# EAGLE board LESR_MainBoard (EAGLE 9.5.2)
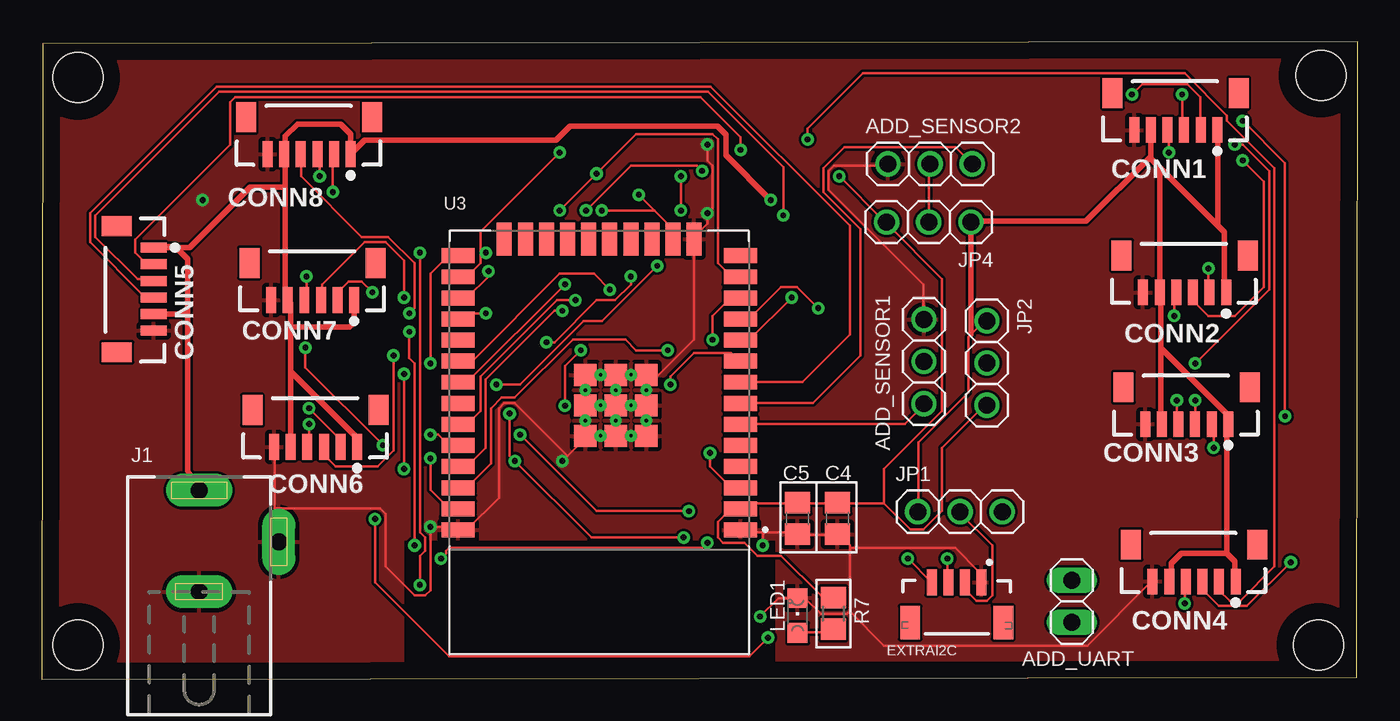
[diagram p0: board, top side]
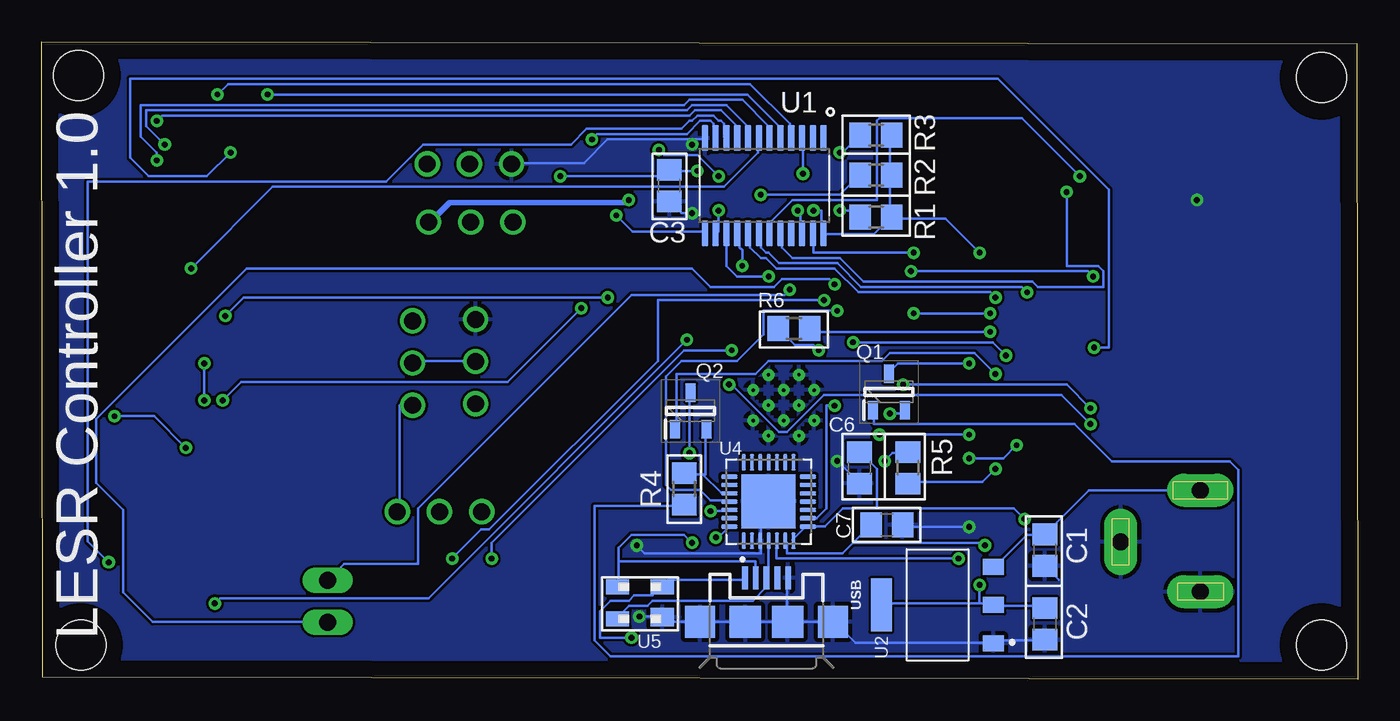
[diagram p1: board, bottom side, seen from below]

Size 79.24 x 38.41 mm. Coordinates in mm from the lower left corner, seen from the top.
Outline: 0,0 79.16,0.14 79.24,38.41 0.08,38.27 0,0
Copper layers (1*16): Top 0.035mm / dielectric 1.5mm / Bottom 0.035mm
Design rules "default": minimum track width 6mil, minimum drill 0.35mm, track to track 6mil, track to pad 6mil, pad to pad 6mil, via to via 6mil, smd to smd 6mil, copper to edge 40mil, drill to drill 6mil, minimum pad ring 10mil, minimum via ring 8mil, stop-mask expansion 4mil, vias tented up to drill 0mil, thermal gap 10mil
Holes 3 mm at 2.2,36.23 2.2,2.07 77,36.36 76.87,2.07

## Footprints (pad centres in the part's own frame; a part is rotated, then mirrored left to right if it is on the bottom)
1X03 = drill 1.016: 1 -2.54,0; 2 0,0; 3 2.54,0
1X02 = drill 1.016 long: 1 -1.27,0; 2 1.27,0
C0805 = smd 1.3 x 1.5: 1 -0.95,0; 2 0.95,0
JST-6-SMD-VERT-1.0MM = smd 0.6 x 1.55: 1 -2.54,1.27; 2 -1.54,1.27; 3 -0.54,1.27; 4 0.46,1.27; 5 1.46,1.27; 6 2.46,1.27 | smd 1.2 x 1.8: P$1 -3.84,-0.955; P$2 3.76,-0.955
JST04_1MM_VERT = smd 0.6 x 1.55: 1 -1.478,0.775; 2 -0.478,0.775; 3 0.522,0.775; 4 1.522,0.775 | smd 1.2 x 2: NC1 -2.778,3.2; NC2 2.822,3.2
DCJ0202 = drill 1 pad 2 long: 1 0,3.1; 2 4.8,0; 3 0,-3
CHIPLED_0805 = smd 1.2 x 1.2: A 0,-1.05; C 0,1.05
SOT95P240X115-3N = smd 1.1 x 0.6: 1 -1.1,0.95; 2 -1.1,-0.95; 3 1.1,0
R0805 = smd 1.3 x 1.5: 1 -0.95,0; 2 0.95,0
SOP65P640X120-24N = smd 1.57 x 0.41: 1 -2.87,3.575; 2 -2.87,2.925; 3 -2.87,2.275; 4 -2.87,1.625; 5 -2.87,0.975; 6 -2.87,0.325; 7 -2.87,-0.325; 8 -2.87,-0.975; 9 -2.87,-1.625; 10 -2.87,-2.275; 11 -2.87,-2.925; 12 -2.87,-3.575; 13 2.87,-3.575; 14 2.87,-2.925; 15 2.87,-2.275; 16 2.87,-1.625; 17 2.87,-0.975; 18 2.87,-0.325; 19 2.87,0.325; 20 2.87,0.975; 21 2.87,1.625; 22 2.87,2.275; 23 2.87,2.925; 24 2.87,3.575
SOT-223 = smd 0.96 x 1.26: 1 -2.3,-3.375; 2 0,-3.375; 3 2.3,-3.375 | smd 3.19 x 1.26: 4 0,3.375
MODULE_ESP32-WROOM-32 = smd 2 x 0.9: 1 -8.5,5.26; 2 -8.5,3.99; 3 -8.5,2.72; 4 -8.5,1.45; 5 -8.5,0.18; 6 -8.5,-1.09; 7 -8.5,-2.36; 8 -8.5,-3.63; 9 -8.5,-4.9; 10 -8.5,-6.17; 11 -8.5,-7.44; 12 -8.5,-8.71; 13 -8.5,-9.98; 14 -8.5,-11.25; 25 8.5,-11.25; 26 8.5,-9.98; 27 8.5,-8.71; 28 8.5,-7.44; 29 8.5,-6.17; 30 8.5,-4.9; 31 8.5,-3.63; 32 8.5,-2.36; 33 8.5,-1.09; 34 8.5,0.18; 35 8.5,1.45; 36 8.5,2.72; 37 8.5,3.99; 38 8.5,5.26 | smd 0.9 x 2: 15 -5.715,-12.25; 16 -4.445,-12.25; 17 -3.175,-12.25; 18 -1.905,-12.25; 19 -0.635,-12.25; 20 0.635,-12.25; 21 1.905,-12.25; 22 3.175,-12.25; 23 4.445,-12.25; 24 5.715,-12.25 | smd 1.33 x 1.33: 39_1 -2.835,-0.405; 39_2 -1,-0.405; 39_3 0.835,-0.405; 39_4 -2.835,-2.24; 39_5 -1,-2.24; 39_6 0.835,-2.24; 39_7 -2.835,-4.075; 39_8 -1,-4.075; 39_9 0.835,-4.075 | drill 0.2 pad 0.3: 39_10 -1.917,-0.405; 39_11 -0.083,-0.405; 39_12 -2.835,-1.323; 39_13 -1,-1.323; 39_14 0.835,-1.323; 39_15 -1.917,-2.24; 39_16 -0.083,-2.24; 39_17 -2.835,-3.158; 39_18 -1,-3.158; 39_19 0.835,-3.158; 39_20 -1.917,-4.075; 39_21 -0.083,-4.075
QFN50P500X500X80-29N = smd 1.01 x 0.27: 1 -2.36,1.5; 2 -2.36,1; 3 -2.36,0.5; 4 -2.36,0; 5 -2.36,-0.5; 6 -2.36,-1; 7 -2.36,-1.5; 15 2.36,-1.5; 16 2.36,-1; 17 2.36,-0.5; 18 2.36,0; 19 2.36,0.5; 20 2.36,1; 21 2.36,1.5 | smd 0.27 x 1.01: 8 -1.5,-2.36; 9 -1,-2.36; 10 -0.5,-2.36; 11 0,-2.36; 12 0.5,-2.36; 13 1,-2.36; 14 1.5,-2.36; 22 1.5,2.36; 23 1,2.36; 24 0.5,2.36; 25 0,2.36; 26 -0.5,2.36; 27 -1,2.36; 28 -1.5,2.36 | smd 3.25 x 3.25: 29 0,0
SOT143 = smd 1.4 x 1.1: 1 -1.35,0.86 | smd 1.4 x 0.9: 2 -1.35,-0.96; 3 1.35,-0.96; 4 1.35,0.96
USB-MICROB = smd 1.4 x 0.35: D+ -2.65,0; D- -2.65,-0.65; GND -2.65,1.3; ID -2.65,0.65; VBUS -2.65,-1.3 | smd 1.9 x 1.8: MT1 0,-4; MT2 0,4 | smd 1.9 x 1.9: P$1 0,-1.27; P$2 0,1.27

## Placement (x,y rotation side)
ADD_SENSOR1  [1X03]  53.11,19.14 270 top
ADD_SENSOR2  [1X03]  53.48,31.04 0 top
ADD_UART  [1X02]  62.01,4.7 270 top
C1  4.7uF  [C0805]  18.83,7.79 270 bottom
C2  4.7uF  [C0805]  18.83,3.34 270 bottom
C3  10uF  [C0805]  41.45,29.73 270 bottom
C4  10uF  [C0805]  47.92,9.69 270 top
C5  0.1uF  [C0805]  45.5,9.69 270 top
C6  1uF  [C0805]  30.01,12.74 270 bottom
C7  0.1uF  [C0805]  28.36,9.31 0 bottom
CONN1  JST_6_PIN_VERTICAL  [JST-6-SMD-VERT-1.0MM]  68.22,34.35 180 top
CONN2  JST_6_PIN_VERTICAL  [JST-6-SMD-VERT-1.0MM]  68.76,24.57 180 top
CONN3  JST_6_PIN_VERTICAL  [JST-6-SMD-VERT-1.0MM]  68.88,16.64 180 top
CONN4  JST_6_PIN_VERTICAL  [JST-6-SMD-VERT-1.0MM]  69.33,7.16 180 top
CONN5  JST_6_PIN_VERTICAL  [JST-6-SMD-VERT-1.0MM]  5.49,23.46 270 top
CONN6  JST_6_PIN_VERTICAL  [JST-6-SMD-VERT-1.0MM]  16.46,15.27 180 top
CONN7  JST_6_PIN_VERTICAL  [JST-6-SMD-VERT-1.0MM]  16.28,24.12 180 top
CONN8  JST_6_PIN_VERTICAL  [JST-6-SMD-VERT-1.0MM]  16.07,32.89 180 top
EXTRAI2C  Vertical Qwiic Connector  [JST04_1MM_VERT]  55.11,6.62 180 top
J1  DCJ0202  [DCJ0202]  9.49,8.28 0 top
JP1  [1X03]  55.28,10.1 0 top
JP2  [1X03]  56.9,19.05 270 top
JP4  [1X03]  53.4,27.53 180 top
LED1  [CHIPLED_0805]  45.5,3.85 0 top
Q1  SS8050-G  [SOT95P240X115-3N]  28.23,17.31 90 bottom
Q2  SS8050-G  [SOT95P240X115-3N]  40.17,16.17 90 bottom
R1  10k  [R0805]  29.01,27.83 0 bottom
R2  10k  [R0805]  29.01,30.37 0 bottom
R3  10k  [R0805]  29.01,32.78 0 bottom
R4  10k  [R0805]  40.55,11.47 270 bottom
R5  10k  [R0805]  27.09,12.74 90 bottom
R6  10k  [R0805]  33.95,21.12 180 bottom
R7  470  [R0805]  47.66,3.98 90 top
U1  TCA9548APWR  [SOP65P640X120-24N]  35.74,29.73 270 bottom
U2  NCP1117ST33T3G  [SOT-223]  25.31,4.48 90 bottom
U3  ESP32-WROOM-32  [MODULE_ESP32-WROOM-32]  33.57,14.26 180 top
U4  CP2102N-A01-GQFN28  [QFN50P500X500X80-29N]  35.47,10.71 90 bottom
U5  SP0503BAHT  [SOT143]  43.22,4.61 180 bottom
USB  [USB-MICROB]  35.6,3.47 270 bottom

## Library data of the parts
ADD_SENSOR1 ADD_SENSOR2 JP1 JP2 JP4 = adafruit
ADD_UART = pinhead
C1-C7 = rcl; SPICEPREFIX: C
CONN1-CONN8 = SparkFun-Connectors; PROD_ID: CONN-08249; SF_ID: GPS-00579
EXTRAI2C = SparkFun-Connectors; PROD_ID: CONN-14483
J1 = con-jack; OC_FARNELL: unknown; OC_NEWARK: unknown
LED1 = led
Q1 Q2 = SS8050-G_NPN_transistor; AVAILABILITY: Unavailable; DESCRIPTION: Bipolar _BJT_ Transistor NPN 25V 1.5A 100MHz 300mW Surface Mount SOT-23; MF: Comchip Technology; MP: SS8050-G; PACKAGE: TO-236 Comchip; PRICE: None
R1-R7 = rcl; SPICEPREFIX: R
U1 = TCA9548APWR_I2CMultiplexer; AVAILABILITY: Unavailable; DESCRIPTION: IC I2C SW 8CH W/RESET 24TSSOP; DIGIKEY-PURCHASE-URL: https://snapeda.com/shop?store=DigiKey&id=280817; MF: Texas Instruments; MP: TCA9548APWR; PACKAGE: TSSOP-24 Texas Instruments; PRICE: None
U2 = IC; CREATED_BY: PCBLayout.com; DIGIKEY_PART_NUMBER: NCP1117ST33T3GOSTR-ND; MANUFACTURER: ON Semiconductor; MPN: NCP1117ST33T3G; PACKAGE: SOT-223
U3 = ESP32-WROOM-32; AVAILABILITY: Unavailable; DESCRIPTION: Bluetooth, WiFi 802.11b/g/n, Bluetooth v4.2 + EDR, Class 1, 2 and 3 Transceiver Module 2.4GHz ~ 2.5GHz Integrated, Trace Surface Mount; MF: Espressif Systems; MP: ESP32-WROOM-32; PACKAGE: Module Espressif Systems; PRICE: None
U4 = CP2102N-A01-GQFN28; AVAILABILITY: Unavailable; DESCRIPTION: USB Bridge, USB to UART USB 2.0 UART Interface 28-QFN (5x5); MF: Silicon Labs; MP: CP2102N-A01-GQFN28; PACKAGE: QFN-28 Silicon Labs; PRICE: None
U5 = ESD_SP0503BAHT; AVAILABILITY: Unavailable; DESCRIPTION: 8.5V Clamp Ipp Tvs Diode Surface Mount SOT-143-4; MF: Littelfuse Inc.; MP: SP0503BAHT; PACKAGE: SOT-143 Littelfuse; PRICE: None
USB = SparkFun-Connectors; PROD_ID: CONN-09505; SF_ID: PRT-08533

## Nets
3.3V: C2.1 C3.1 C4.1 C5.1 JP1.3 JP2.3 JP4.3 R1.2 R2.2 R3.2 R7.2 U1.24 U2.2 U2.4 U3.2
DN: U4.5 U5.3 USB.D-
DP: U4.4 U5.4 USB.D+
DTR: Q1.2 R5.2 U4.28
E_RX: ADD_UART.2 U3.31
E_TX: ADD_UART.1 U3.30
EN: Q2.3 U3.3
GND: ADD_SENSOR1.1 ADD_SENSOR2.1 C1.2 C2.2 C3.2 C4.2 C5.2 C6.2 C7.2 CONN1.6 CONN2.6 CONN3.6 CONN4.6 CONN5.6 CONN6.6 CONN7.6 CONN8.6 EXTRAI2C.1 J1.2 J1.3 LED1.C U1.12 U2.1 U3.1 U3.15 U3.38 U3.39_1 U3.39_2 U3.39_3 U3.39_4 U3.39_5 U3.39_6 U3.39_7 U3.39_8 U3.39_9 U3.39_10 U3.39_11 U3.39_12 U3.39_13 U3.39_14 U3.39_15 U3.39_16 U3.39_17 U3.39_18 U3.39_19 U3.39_20 U3.39_21 U4.3 U4.29 U5.1 USB.GND USB.MT1 USB.MT2 USB.P$1 USB.P$2
IO0: Q1.3 U3.25
IO16: CONN7.4 U3.27
IO17: CONN8.4 U3.28
IO21: EXTRAI2C.3 U3.33
IO22: EXTRAI2C.4 U3.36
IO23: CONN1.4 U3.37
IO25: CONN2.4 U3.10
IO26: CONN3.4 U3.11
IO27: CONN4.4 U3.12
IO32: CONN5.4 U3.8
IO33: CONN6.4 U3.9
IO34: ADD_SENSOR1.3 U3.6
IO35: ADD_SENSOR2.3 U3.7
M_RST: R1.1 U1.3 U3.13
M_SCL: R2.1 U1.22 U3.16
M_SDA: R3.1 U1.23 U3.26
N$1: ADD_SENSOR1.2 JP2.2
N$3: Q1.1 R4.2
N$4: Q2.1 R5.1
N$5: ADD_SENSOR2.2 JP4.2
N$6: R6.2 U4.9
N$7: EXTRAI2C.2 JP1.2
N$8: LED1.A R7.1
RTS: Q2.2 R4.1 U4.24
RXD: U3.34 U4.26
SC0: CONN1.2 U1.5
SC1: CONN2.2 U1.7
SC2: CONN3.2 U1.9
SC3: CONN4.2 U1.11
SC4: CONN5.2 U1.14
SC5: CONN6.2 U1.16
SC6: CONN7.2 U1.18
SC7: CONN8.2 U1.20
SD0: CONN1.3 U1.4
SD1: CONN2.3 U1.6
SD2: CONN3.3 U1.8
SD3: CONN4.3 U1.10
SD4: CONN5.3 U1.13
SD5: CONN6.3 U1.15
SD6: CONN7.3 U1.17
SD7: CONN8.3 U1.19
TXD: U3.35 U4.25
VBUS: C6.1 U4.7 U4.8 U5.2 USB.VBUS
VDD: C7.1 R6.1 U4.6
VIN: C1.1 CONN1.1 CONN1.5 CONN2.1 CONN2.5 CONN3.1 CONN3.5 CONN4.1 CONN4.5 CONN5.1 CONN5.5 CONN6.1 CONN6.5 CONN7.1 CONN7.5 CONN8.1 CONN8.5 J1.1 JP1.1 JP2.1 JP4.1 U2.3

## Tracks (layer width: path | path; a pad name or v marks a point on that pad's centre or on a via)
3.3V  (via drill 0.35)
  Top 0.152: R7.2 47.54,5.06 46.9,5.06 44.52,7.44 43.09,7.44 42.3,8.23 41.03,8.23 40.71,8.55 40.71,9.5 41.35,10.13 41.98,10.13 U3.2 42.14,10.29 42.46,10.61 45.47,10.61 C5.1 45.63,10.61 47.85,10.61 C4.1 48.01,10.61 50.71,10.61 | 50.71,10.61 52.3,9.02 53.09,9.02 54.2,10.13 54.2,13.94 56.74,16.48 JP2.3 | v48.01,30.3 50.71,27.6 JP4.3 50.87,27.44 54.2,24.1 54.2,16.17 50.71,12.68 50.71,10.61 | v32.77,28.23 35.47,30.93 39.44,30.93 v39.76,30.61 | v22.77,5.69 22.77,7.44 23.09,7.75 23.09,8.55 22.77,8.86 v22.77,25.69
  Bottom 0.152: JP1.3 57.7,10.13 57.7,16.48 56.9,16.48 JP2.3 | C2.1 18.96,4.42 21.82,4.42 U2.2 21.98,4.58 22.77,4.58 | 22.77,4.58 28.65,4.58 U2.4 | R1.2 28.17,27.91 28.17,30.3 R2.2 28.17,30.46 28.17,32.68 R3.2 | R1.2 28.17,27.76 29.12,26.8 32.14,26.8 U1.24 32.3,26.96 32.3,28.23 v32.77,28.23 | v48.01,30.3 41.82,30.3 41.5,30.61 C3.1 41.35,30.61 v39.76,30.61 | v22.77,5.69 22.77,4.58 | v22.77,25.69 24.84,27.76 28.01,27.76 R1.2
DN  (via drill 0.35)
  Top 0.152: v24.04,7.28 24.36,7.6 24.36,7.75 24.52,7.91 39.76,7.91 v40.08,8.23
  Bottom 0.152: v24.04,7.28 35,7.28 35,8.23 U4.5 | v40.08,8.23 40.55,8.71 43.73,8.71 44.52,7.91 44.52,7.12 | 44.52,7.12 44.52,5.69 U5.3 | 44.52,7.12 36.27,7.12 36.27,6.17 USB.D-
DP
  Bottom 0.152: U4.4 35.47,6.17 USB.D+ 35.63,6.01 35.63,5.53 36.42,4.74 42.46,4.74 42.77,4.42 43.89,4.42 44.52,3.79 U5.4
DTR  (via drill 0.35)
  Top 0.152: v38.65,8.55 33.09,8.55 v28.49,13.15 28.17,13.47 v28.17,16.01
  Bottom 0.152: v38.65,8.55 38.49,8.55 37.85,9.18 U4.28 | v28.49,13.15 28.01,13.63 27.22,13.63 R5.2 | v28.17,16.01 27.53,16.01 27.38,16.17 Q1.2
E_RX  (via drill 0.35)
  Top 0.152: v31.5,23.79 25.63,17.91 25.15,17.91 U3.31
  Bottom 0.152: v31.5,23.79 31.82,24.1 34.68,24.1 35.15,23.63 38.96,23.63 40.08,24.74 66.9,24.74 75.95,15.69 75.95,11.82 74.33,10.2 74.33,5.25 72.56,3.47 62.14,3.47 ADD_UART.2
E_TX  (via drill 0.35)
  Top 0.152: v34.2,23.47 33.25,24.42 31.19,24.42 25.95,19.18 25.15,19.18 U3.30
  Bottom 0.152: v34.2,23.47 34.52,23.15 43.73,23.15 56.59,10.29 56.59,6.96 61.03,6.96 61.98,6.01 ADD_UART.1
EN  (via drill 0.35)
  Top 0.152: v40.23,13.63 40.23,12.83 41.5,11.56 41.98,11.56 U3.3
  Bottom 0.152: v40.23,13.63 40.23,17.12 Q2.3
GND  (via drill 0.35)
  Top 0.152: CONN3.6 66.43,15.21 | 66.43,23.15 CONN2.6 66.27,23.31 | 65.79,33 CONN1.6 | 66.75,6.01 CONN4.6 66.75,5.85 62.94,2.04 50.71,2.04 48.65,4.1 | 48.65,4.1 48.49,3.94 46.9,3.94 45.95,4.9 45.63,4.9 LED1.C 45.47,4.9 44.36,4.9 v43.25,3.79 | 48.65,7.91 48.65,8.07 48.01,8.71 C4.2 47.85,8.71 45.63,8.71 C5.2 45.47,8.86 43.41,8.86 | 48.65,7.91 48.65,4.1 | 48.65,7.91 55,7.91 56.43,6.48 56.43,5.85 EXTRAI2C.1 | 43.41,8.86 42.14,8.86 U3.1 | 43.41,8.86 v43.41,8.07 | ADD_SENSOR1.1 53.09,21.72 53.09,23.79 47.38,29.5 47.38,30.61 47.7,30.93 50.87,30.93 ADD_SENSOR2.1 | 32.77,14.74 32.77,15.53 U3.39_14 | 31.66,13.47 32.77,14.58 U3.39_3 32.77,14.74 | 31.66,13.47 v31.34,13.15 | 32.77,14.74 33.57,14.74 U3.39_11 33.73,14.74 34.52,14.74 U3.39_2 34.68,14.74 34.68,15.53 U3.39_13 34.68,15.69 34.68,16.48 U3.39_5 | 31.66,13.47 28.49,16.64 27.85,16.64 27.53,16.33 27.53,10.93 25.63,9.02 25.15,9.02 U3.38 24.99,9.02 24.84,9.18 v23.41,9.18 23.41,5.37 23.09,5.06 22.45,5.06 20.71,6.8 20.71,9.98 20.39,10.29 14.04,10.29 14.04,13.94 CONN6.6 13.88,14.1 | U3.39_5 34.68,16.64 34.68,17.28 U3.39_18 34.68,17.44 34.68,18.23 U3.39_8 34.68,18.39 35.47,18.39 U3.39_20 35.63,18.39 36.27,18.39 U3.39_7 36.42,18.23 36.42,17.6 | U3.39_5 34.52,16.48 33.73,16.48 U3.39_16 33.57,16.48 32.77,16.48 U3.39_6 32.77,16.64 32.77,17.28 U3.39_19 32.77,17.44 32.77,18.23 U3.39_9 32.77,18.39 33.57,18.39 U3.39_21 | U3.39_10 35.63,14.74 36.27,14.74 U3.39_1 36.42,14.74 36.42,15.53 U3.39_12 36.42,15.69 36.42,16.48 U3.39_4 | U3.39_4 36.27,16.48 35.63,16.48 U3.39_15 | U3.39_17 36.42,17.28 36.42,16.64 U3.39_4 | 36.42,17.6 36.42,17.44 U3.39_17
  Top 0.152: 36.42,17.6 39.28,20.45 U3.15 39.28,26.64 40.08,27.44 v40.08,28.07 40.39,28.39 40.39,30.93 40.08,31.25 v40.08,32.2 | 36.42,17.6 U3.39_17 | 6.9,21.09 CONN5.6 | 13.72,22.84 CONN7.6 | 13.88,22.84 CONN7.6 | 13.72,31.57 CONN8.6 | 13.72,22.99 CONN7.6
  Bottom 0.152: U4.29 35.47,10.61 35.95,10.61 35.95,8.39 U4.3 35.95,8.23 35.95,7.6 42.93,7.6 v43.41,8.07 | 40.08,32.52 45.16,32.52 46.58,31.09 50.87,31.09 ADD_SENSOR2.1 | 40.08,32.52 39.44,32.52 U1.12 | v23.41,9.18 27.38,9.18 C7.2 | v31.34,13.15 30.07,11.88 C6.2 | v40.08,28.07 40.71,28.07 41.35,28.71 C3.2 | v40.08,32.2 40.08,32.52 | 34.36,3.47 34.36,6.01 USB.GND | 34.36,3.47 USB.P$1 USB.MT1 41.66,3.47 41.82,3.63 U5.1 41.98,3.79 v43.25,3.79 | 34.36,3.47 USB.P$2 USB.MT2 31.5,3.47 30.23,2.2 21.98,2.2 U2.1 21.82,2.2 21.66,2.36 18.96,2.36 C2.2 18.8,2.52 | 18.01,6.01 18.8,6.8 C1.2
  other vias: 9.69,28.87
  pour Bottom: -1.36,40.3 80.94,40.3 81.32,39.92 81.32,-1.36 81.45,-1.49 -1.99,-1.49 -2.25,-1.23 -2.25,40.17 -2.12,40.3
  pour Top: -1.36,39.79 80.3,39.79 80.3,-0.09 79.92,-0.47 44.23,-0.47 44.23,8.42 21.76,8.42 21.76,0.17 21.63,0.04 21.5,-0.09 -0.6,-0.09 -0.6,38.9 -1.49,39.79
IO0  (via drill 0.35)
  Top 0.152: v23.41,19.03 23.41,24.42 24.36,25.37 24.99,25.37 U3.25
  Bottom 0.152: v23.41,19.03 27.69,19.03 28.17,18.55 Q1.3
IO16  (via drill 0.35)
  Top 0.152: v15.95,24.26 15.95,22.99 CONN7.4 | v26.9,24.58 26.9,24.26 25.63,22.99 25.15,22.99 U3.27
  Bottom 0.152: v15.95,24.26 16.26,24.58 v26.9,24.58
IO17  (via drill 0.35)
  Top 0.152: v22.14,22.04 22.45,22.36 22.45,25.06 20.87,26.64 19.28,26.64 15.63,30.3 15.63,31.57 CONN8.4 | v26.74,22.04 25.47,22.04 25.15,21.72 U3.28
  Bottom 0.152: v26.74,22.04 v22.14,22.04
IO21  (via drill 0.35)
  Top 0.152: v54.52,7.28 54.52,5.85 EXTRAI2C.3 | v32.14,22.84 31.03,22.84 26.42,18.23 26.42,16.17 25.63,15.37 25.15,15.37 U3.33
  Bottom 0.152: v54.52,7.28 52.78,9.02 52.3,9.02 42.14,19.18 42.14,22.84 v32.14,22.84
IO22  (via drill 0.35)
  Top 0.152: v52.14,7.28 53.57,5.85 EXTRAI2C.4 | v37.69,19.82 35.79,19.82 35.15,20.45 31.98,20.45 28.49,16.96 27.69,16.96 27.06,16.33 27.06,12.99 25.63,11.56 25.15,11.56 U3.36
  Bottom 0.152: v52.14,7.28 52.14,8.23 40.55,19.82 v37.69,19.82
IO23  (via drill 0.35)
  Top 0.152: v67.86,31.73 67.86,33 CONN1.4 | v15.88,19.98 15.88,18.77 v20.55,14.1 | v23.41,13.31 23.41,11.41 24.52,10.29 24.99,10.29 U3.37
  Bottom 0.152: v67.86,31.73 69.29,30.3 72.78,30.3 73.89,31.41 73.89,36.17 21.66,36.17 14.99,29.5 14.99,19.98 v15.88,19.98 | v20.55,14.1 21.34,13.31 v23.41,13.31
IO25  (via drill 0.35)
  Top 0.152: v68.17,21.88 68.17,23.15 CONN2.4 | v45.16,22.99 42.62,20.45 42.14,20.45 U3.10
  Bottom 0.152: v68.17,21.88 67.06,22.99 v45.16,22.99
IO26  (via drill 0.35)
  Top 0.152: v68.33,16.8 68.33,15.37 CONN3.4 | v46.74,22.36 45.47,23.63 44.52,23.63 42.62,21.72 42.14,21.72 U3.11
  Bottom 0.152: v68.33,16.8 67.22,17.91 51.19,17.91 v46.74,22.36
IO27  (via drill 0.35)
  Top 0.152: v68.81,4.58 68.81,5.85 CONN4.4 | v40.39,20.45 40.39,21.88 41.35,22.84 41.98,22.84 U3.12
  Bottom 0.152: v68.81,4.58 68.49,4.9 55.95,4.9 v40.39,20.45
IO32
  Top 0.152: CONN5.4 6.74,23.15 6.1,23.15 2.93,26.33 2.93,28.07 10.55,35.69 40.27,35.69 48.65,27.31 48.65,20.77 45.79,17.91 42.14,17.91 U3.8
IO33  (via drill 0.35)
  Top 0.152: v16.1,15.37 16.1,14.1 CONN6.4 | v37.85,17.75 37.85,18.23 39.28,19.66 41.5,19.66 41.98,19.18 U3.9
  Bottom 0.152: v16.1,15.37 17.85,17.12 32.14,17.12 34.36,14.9 34.84,14.9 37.69,17.75 v37.85,17.75
IO34
  Top 0.152: U3.6 42.14,15.37 51.98,15.37 53.09,16.48 ADD_SENSOR1.3
IO35
  Top 0.152: U3.7 42.14,16.64 46.43,16.64 49.28,19.5 49.28,27.12 47.06,29.34 47.06,30.77 48.33,32.04 55,32.04 55.95,31.09 ADD_SENSOR2.3
M_RST  (via drill 0.35)
  Top 0.152: v31.19,28.23 v33.41,30.46 35.79,32.84 40.39,32.84 40.71,32.52 40.71,25.06 41.5,24.26 41.98,24.26 U3.13
  Bottom 0.152: v31.19,28.23 30.39,28.23 30.07,27.91 R1.1 | v33.41,30.46 33.41,32.52 U1.3
M_SCL  (via drill 0.35)
  Top 0.152: 36.9,28.23 38.01,27.12 U3.16 | 36.9,28.23 v35.95,29.18 | 36.9,28.23 v33.73,28.23
  Bottom 0.152: v35.95,29.18 31.19,29.18 30.07,30.3 R2.1 | v33.73,28.23 33.57,28.23 33.57,26.96 U1.22
M_SDA  (via drill 0.35)
  Top 0.152: v31.19,31.73 26.42,26.96 26.42,25.69 | 26.42,25.69 26.42,25.06 25.63,24.26 25.15,24.26 U3.26 | 26.42,25.69 v26.74,25.69
  Bottom 0.152: v31.19,31.73 31.03,31.73 30.07,32.68 R3.1 | v26.74,25.69 32.77,25.69 32.77,26.8 U1.23
N$1
  Bottom 0.152: ADD_SENSOR1.2 53.25,19.18 56.74,19.18 JP2.2
N$3
  Bottom 0.152: Q1.1 29.12,16.17 29.12,15.37 17.06,15.37 14.8,13.12 7.72,13.12 7.21,12.61 7.21,1.4 45,1.4 45.95,2.36 45.95,10.45 40.55,10.45 R4.2
N$4  (via drill 0.35)
  Top 0.152: v21.82,12.68 v21.82,18.39
  Bottom 0.152: v21.82,18.39 23.09,19.66 28.17,19.66 28.65,19.18 35.47,19.18 36.27,18.39 41.03,18.39 41.03,15.21 Q2.1 | v21.82,12.68 22.61,11.88 27.06,11.88 R5.1
N$5
  Top 0.152: JP4.2 53.41,27.6 53.41,30.93 ADD_SENSOR2.2
N$6  (via drill 0.35)
  Top 0.152: v31.5,16.48 31.5,18.87 v32.46,19.82
  Bottom 0.152: v31.5,16.48 31.98,16.48 31.98,10.29 32.58,9.69 33.1,9.69 U4.9 | v32.46,19.82 32.77,20.14 33.88,20.14 34.84,21.09 R6.2
N$7
  Top 0.152: EXTRAI2C.2 55.63,5.69 55.63,5.37 56.27,4.74 56.9,4.74 57.22,5.06 57.22,8.07 55.32,9.98 JP1.2
N$8
  Top 0.152: LED1.A 45.63,2.83 47.38,2.83 47.54,2.99 R7.1
RTS
  Bottom 0.152: 39.44,12.36 38.33,11.25 37.85,11.25 U4.24 | 39.44,12.36 40.55,12.36 R4.1 | 39.44,12.36 39.28,12.36 39.28,15.06 Q2.2
RXD  (via drill 0.35)
  Top 0.152: v38.96,10.13 33.41,10.13 v28.8,14.74 | v23.41,14.74 23.88,14.74 24.52,14.1 24.99,14.1 U3.34
  Bottom 0.152: v38.96,10.13 37.85,10.13 U4.26 | v23.41,14.74 v28.8,14.74
SC0  (via drill 0.35)
  Top 0.152: v65.63,35.22 66.27,35.85 68.97,35.85 69.76,35.06 69.76,33.15 CONN1.2
  Bottom 0.152: v65.63,35.22 36.74,35.22 34.84,33.31 34.84,32.68 U1.5
SC1  (via drill 0.35)
  Top 0.152: v70.24,24.74 70.24,23.31 CONN2.2
  Bottom 0.152: v70.24,24.74 65.32,29.66 38.17,29.66 36.11,31.73 36.11,32.52 U1.7
SC2  (via drill 0.35)
  Top 0.152: v70.56,13.94 70.56,15.21 CONN3.2 | v74.84,15.85 74.84,31.09 v72.3,33.63
  Bottom 0.152: v70.56,13.94 72.46,15.85 v74.84,15.85 | v72.3,33.63 71.98,33.95 40.23,33.95 39.92,34.26 38.33,34.26 37.38,33.31 37.38,32.68 U1.9
SC3  (via drill 0.35)
  Top 0.152: v46.11,32.52 46.11,33.15 49.44,36.49 68.81,36.49 71.35,33.95 71.35,33.63 74.21,30.77 74.21,6.8 72.14,4.74 71.51,4.74 70.87,5.37 70.87,5.85 CONN4.2
  Bottom 0.152: v46.11,32.52 45.79,32.84 40.39,32.84 39.6,33.63 38.96,33.63 38.81,33.47 38.81,32.68 U1.11
SC4  (via drill 0.35)
  Top 0.152: v42.08,31.88 42.08,32.65 39.66,35.06 11.66,35.06 11.34,34.74 11.34,32.2 5.63,26.49 5.63,25.69 6.26,25.06 6.74,25.06 CONN5.2 | v38.49,28.23 v38.49,30.3
  Bottom 0.152: v42.08,31.88 41.76,31.57 39.76,31.57 v38.49,30.3 | v38.49,28.23 38.49,26.96 38.65,26.96 U1.14
SC5  (via drill 0.35)
  Top 0.152: v16.1,16.33 17.85,14.58 17.85,14.1 CONN6.2 | v27.38,17.75 28.8,17.75 32.61,21.57 33.73,21.57 v37.06,24.9
  Bottom 0.152: v16.1,16.33 17.53,17.75 v27.38,17.75 | v37.06,24.9 37.06,25.85 37.22,26.01 37.22,26.8 U1.16
SC6  (via drill 0.35)
  Top 0.152: v19.91,23.31 19.28,23.95 18.49,23.95 17.85,23.31 17.85,22.99 CONN7.2
  Bottom 0.152: v19.91,23.31 20.23,23.63 29.92,23.63 31.34,25.06 34.84,25.06 35.47,25.69 35.63,25.69 35.95,26.01 35.95,26.8 U1.18
SC7  (via drill 0.35)
  Top 0.152: v17.53,29.34 17.53,31.57 CONN8.2
  Bottom 0.152: v17.53,29.34 17.53,24.9 15.63,24.9 15.31,24.58 15.31,23.63 19.28,23.63 19.6,23.95 29.76,23.95 31.19,25.37 34.04,25.37 34.68,26.01 34.68,26.8 U1.20
SD0  (via drill 0.35)
  Top 0.152: v68.65,35.22 68.65,33.15 CONN1.3
  Bottom 0.152: v68.65,35.22 68.02,35.85 36.58,35.85 34.2,33.47 34.2,32.68 U1.4
SD1  (via drill 0.35)
  Top 0.152: v72.3,31.25 73.57,29.98 73.57,23.63 71.83,21.88 70.24,21.88 69.44,22.68 69.44,23.15 CONN2.3
  Bottom 0.152: v72.3,31.25 72.3,31.73 73.25,32.68 73.25,34.58 40.55,34.58 40.23,34.9 37.06,34.9 35.47,33.31 35.47,32.68 U1.6
SD2  (via drill 0.35)
  Top 0.152: v69.44,16.8 69.44,15.37 CONN3.3 | v69.44,19.03 73.89,23.47 73.89,30.61 72.3,32.2 v71.83,32.2
  Bottom 0.152: v69.44,19.03 v69.44,16.8 | v71.83,32.2 72.94,33.31 72.94,34.26 40.39,34.26 40.08,34.58 38.01,34.58 36.74,33.31 36.74,32.68 U1.8
SD3  (via drill 0.35)
  Top 0.152: v75.19,7.06 72.56,4.42 70.87,4.42 69.92,5.37 69.92,5.85 CONN4.3
  Bottom 0.152: v75.19,7.06 76.46,8.33 76.46,29.98 58.49,29.98 56.27,32.2 47.38,32.2 46.43,33.15 40.71,33.15 40.23,33.63 40.08,33.63 39.76,33.95 38.81,33.95 38.49,33.63 38.33,33.63 38.17,33.47 38.17,32.68 U1.10
SD4  (via drill 0.35)
  Top 0.152: v44.65,27.95 44.65,30.84 40.11,35.38 10.71,35.38 3.25,27.91 3.25,26.64 5.79,24.1 6.74,24.1 CONN5.3
  Bottom 0.152: v44.65,27.95 43.66,26.96 39.44,26.96 U1.13
SD5  (via drill 0.35)
  Top 0.152: v21.18,19.5 21.18,13.79 20.23,12.83 17.69,12.83 17.06,13.47 17.06,13.94 CONN6.3 | v30.39,20.3 30.87,20.3 33.41,22.84 34.52,22.84 35.47,23.79 v35.47,24.26
  Bottom 0.152: v21.18,19.5 21.98,20.3 v30.39,20.3 | v35.47,24.26 37.38,24.26 38.01,24.9 38.01,26.8 U1.15
SD6  (via drill 0.35)
  Top 0.152: v21.82,22.99 21.82,25.22 20.71,26.33 19.44,26.33 16.9,23.79 16.9,22.99 CONN7.3
  Bottom 0.152: v21.82,22.99 22.14,23.31 30.07,23.31 31.5,24.74 35,24.74 35.63,25.37 35.95,25.37 36.58,26.01 36.58,26.8 U1.17
SD7  (via drill 0.35)
  Top 0.152: v16.74,30.3 16.74,31.57 CONN8.3
  Bottom 0.152: v16.74,30.3 20.23,33.79 28.8,33.79 28.96,33.63 28.96,28.87 34.04,28.87 35.31,27.6 35.31,26.96 U1.19
TXD  (via drill 0.35)
  Top 0.152: v31.34,22.2 30.87,22.2 26.74,18.07 26.74,13.94 25.63,12.83 25.15,12.83 U3.35
  Bottom 0.152: v31.34,22.2 35.79,22.2 35.79,20.77 37.38,19.18 40.71,19.18 41.66,18.23 41.66,11.72 41.35,11.41 39.6,11.41 38.96,10.77 37.85,10.77 U4.25
VBUS  (via drill 0.35)
  Top 0.152: v43.73,2.52 42.62,1.4 24.52,1.4 20.07,5.85 v20.07,9.66
  Bottom 0.152: USB.VBUS 36.9,6.01 41.5,6.01 41.82,5.69 U5.2 41.98,5.53 42.46,5.06 43.57,5.06 43.89,4.74 45,4.74 45.63,4.1 45.63,2.52 v43.73,2.52 | U4.7 34.04,8.39 33.25,9.18 U4.8 33.11,9.21 32.07,9.21 30.99,10.29 28.96,10.29 | 28.96,10.29 28.96,12.68 29.92,13.63 C6.1 | v20.07,9.66 20.71,10.29 28.96,10.29
VDD  (via drill 0.35)
  Top 0.152: v22.14,20.93 22.14,19.34 22.45,19.03 v22.45,8.07
  Bottom 0.152: 30.39,8.23 29.44,9.18 C7.1 | 30.39,8.23 31.03,7.6 34.36,7.6 34.36,8.23 U4.6 | v22.14,20.93 32.77,20.93 32.93,21.09 R6.1 | v22.45,8.07 22.61,8.23 30.39,8.23
VIN  (via drill 0.35)
  Top 0.152: 14.99,14.1 CONN6.5 | 14.83,22.84 CONN7.5 14.68,22.99 | 18.96,14.58 18.96,14.1 CONN6.1 | 14.68,31.57 CONN8.5 | JP1.1 52.78,10.13 52.78,14.26 55.79,17.28 55.79,20.61 55.95,20.77 56.74,21.57 JP2.1 | 55.95,27.44 JP4.1 55.95,27.6 | 71.83,6.01 CONN4.1 | 67.38,15.37 CONN3.5 | 67.38,23.15 CONN2.5 67.38,23.31 | 70.81,33.05 CONN1.1 | 71.35,15.37 CONN3.1
  Top 0.33: 14.99,21.22 14.99,22.68 14.83,22.84 | 14.99,21.22 14.99,18.55 | 14.99,18.55 14.99,14.1 | 14.99,18.55 18.96,14.58 | 14.99,21.22 18.55,21.22 18.8,21.47 18.8,22.84 CONN7.1 | 14.68,22.99 14.68,29.63 | 14.68,29.63 14.68,31.57 | CONN8.5 14.68,31.73 14.68,32.71 15.41,33.44 18.01,33.44 18.61,32.84 CONN8.1 19.44,32.46 30.96,32.46 31.82,33.31 40.68,33.31 41.19,32.8 41.19,31.57 v43.89,28.87 | J1.1 8.8,12.56 8.8,22.01 | 55.95,20.77 55.95,27.44 | 71.35,7.6 68.62,7.6 68.02,6.99 68.02,6.01 CONN4.5 | 71.35,7.6 71.83,7.12 71.83,6.01 | 71.35,7.6 71.35,15.21 CONN3.1 | 67.38,23.15 67.38,19.95 | 67.38,19.95 67.38,15.37 | 70.81,33.05 70.81,27.31 | CONN2.1 71.19,23.31 71.19,26.93 70.81,27.31 | 71.35,15.37 71.35,15.98 67.38,19.95 | 55.95,27.6 62.87,27.6 66.76,31.49 | 8.8,22.01 8.8,25.31 8.04,26.07 6.83,26.07 CONN5.1 8.92,26 12.55,29.63 14.68,29.63 | CONN5.5 6.77,22.01 8.8,22.01 | 66.76,31.49 CONN1.5 | 66.76,31.49 66.76,31.36 67.3,30.82 | 70.81,27.31 67.3,30.82 | CONN2.5 67.3,30.82
  Bottom 0.152: U2.3 21.82,6.8 19.91,8.71 18.96,8.71 18.93,8.74 C1.1 16.19,11.38 J1.1 | 44.04,28.71 v43.89,28.87 | 55.79,27.6 JP4.1
  Bottom 0.33: 44.04,28.71 54.68,28.71 55.79,27.6

## Text on the board
bPlace: LESR Controller 1.0